# Altium PCB Edge_logic_analyzer.PcbDoc (part 1 of 3)
Units mm, origin at the board's own origin, x right, y up, seen from the top; angles counter-clockwise.
Board outline 76.03 x 55 mm, 4 copper layers (L1, L2, L3, L4), stack 1.527 mm thick; 110 components, 90 nets, 430 pads, 763 vias.
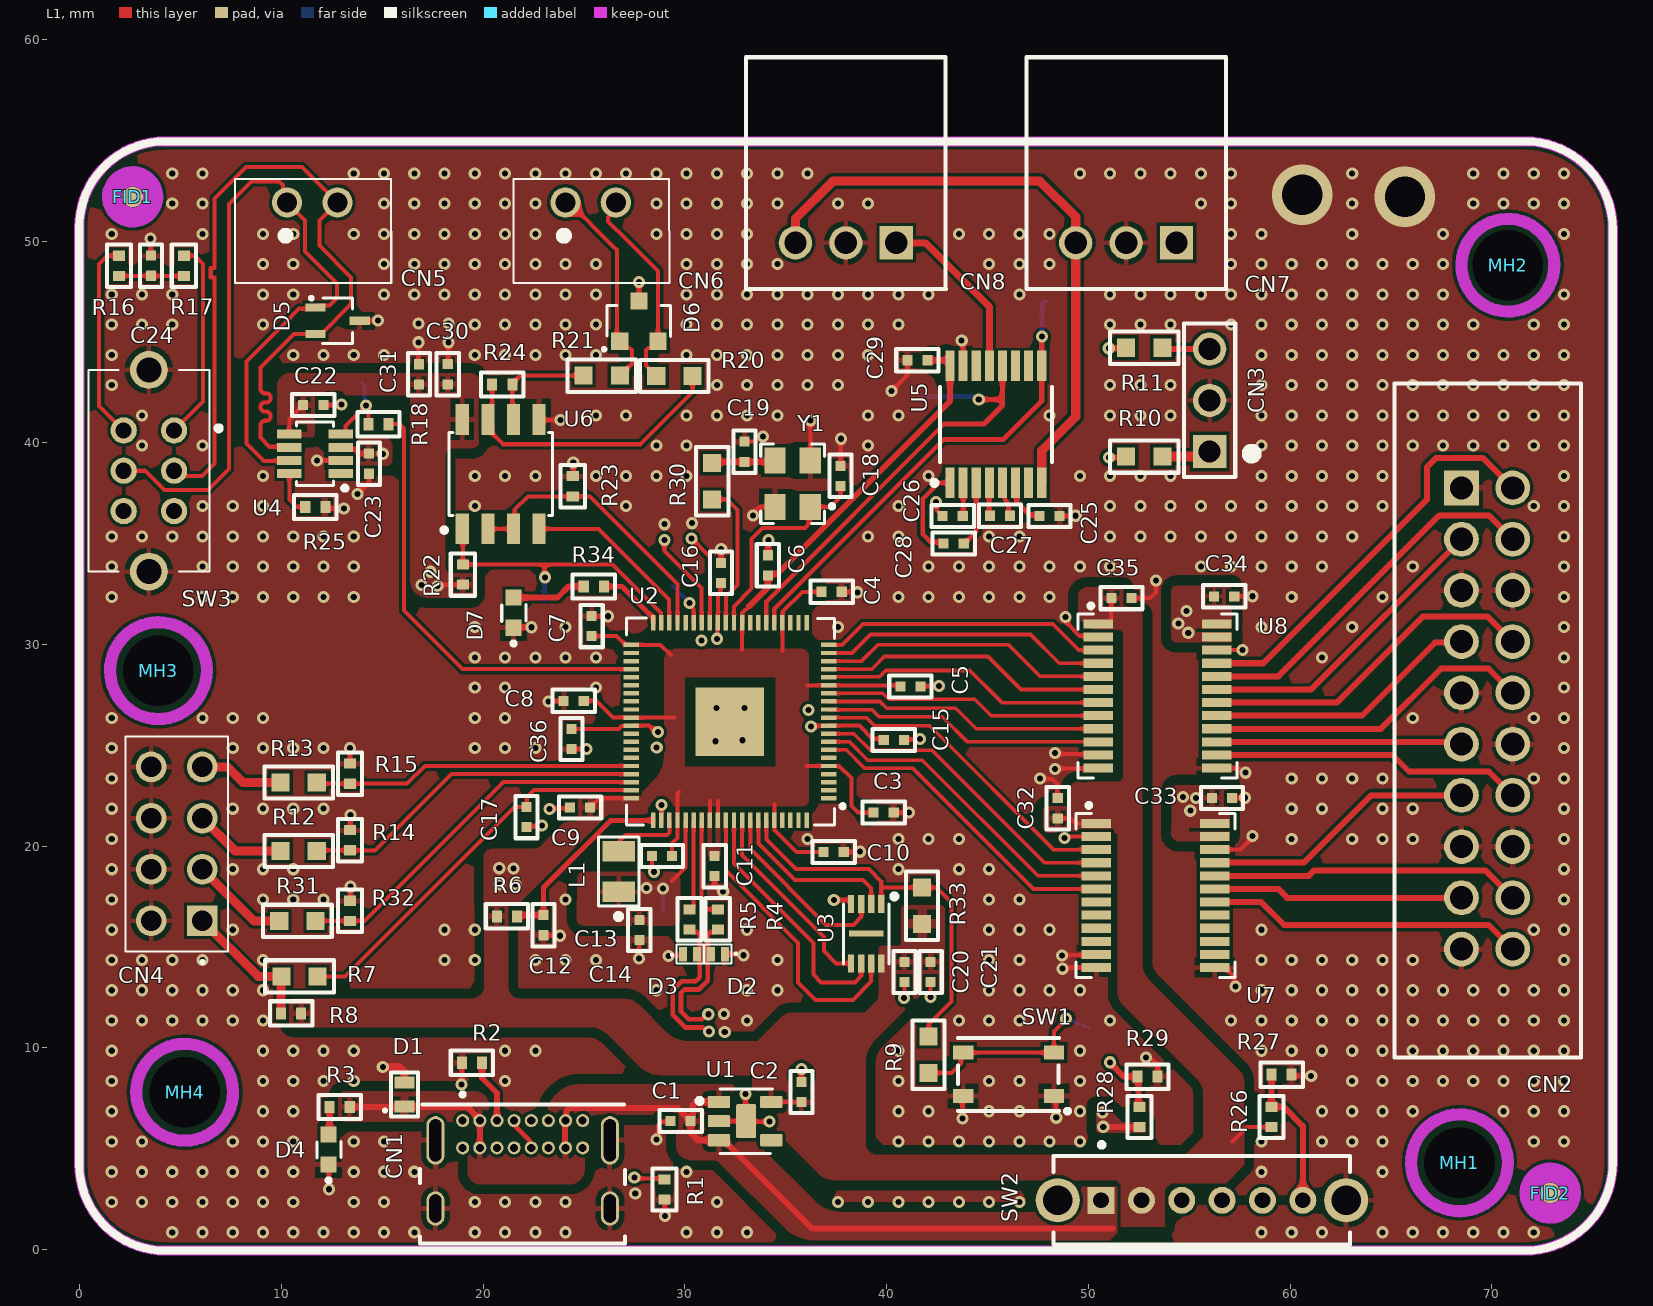
[diagram p0: L1 view]
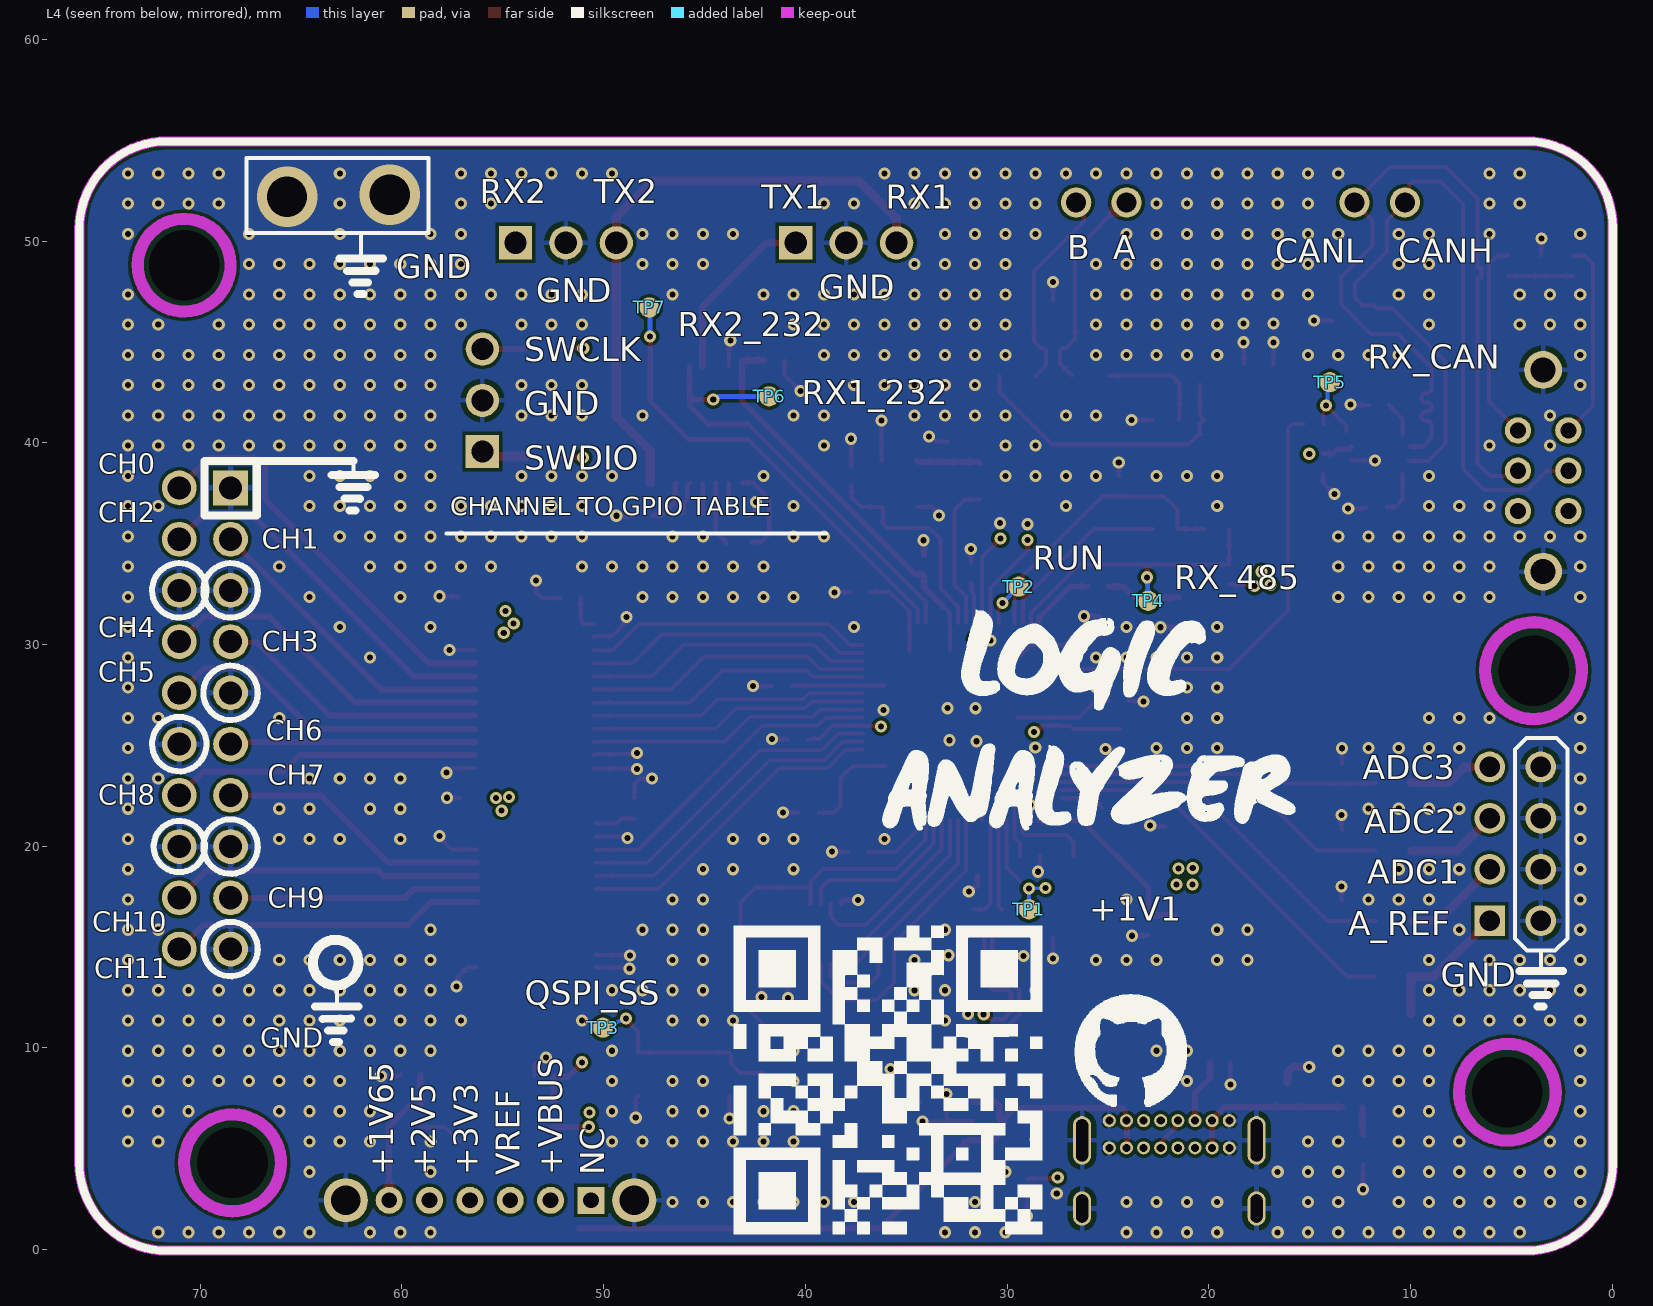
[diagram p1: L4 view, seen from below]
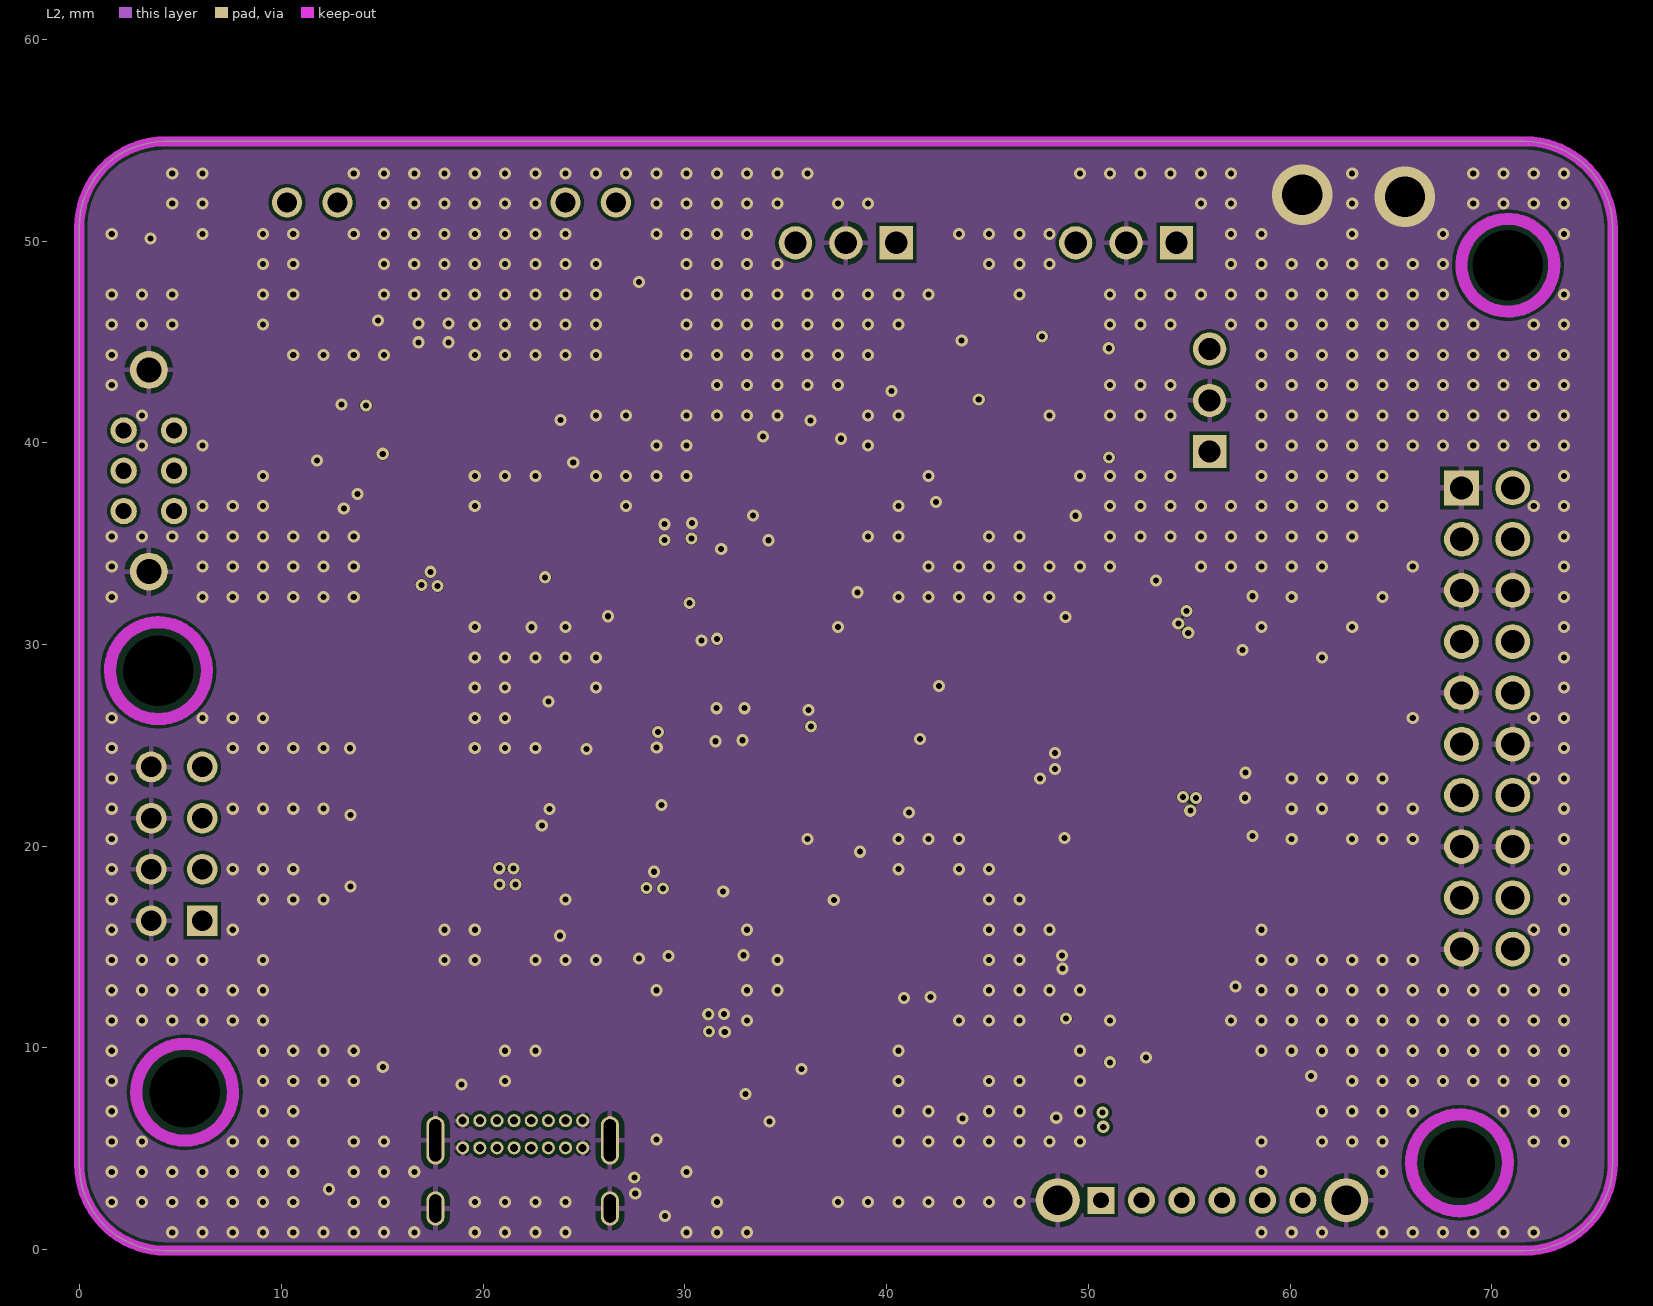
[diagram p2: L2]
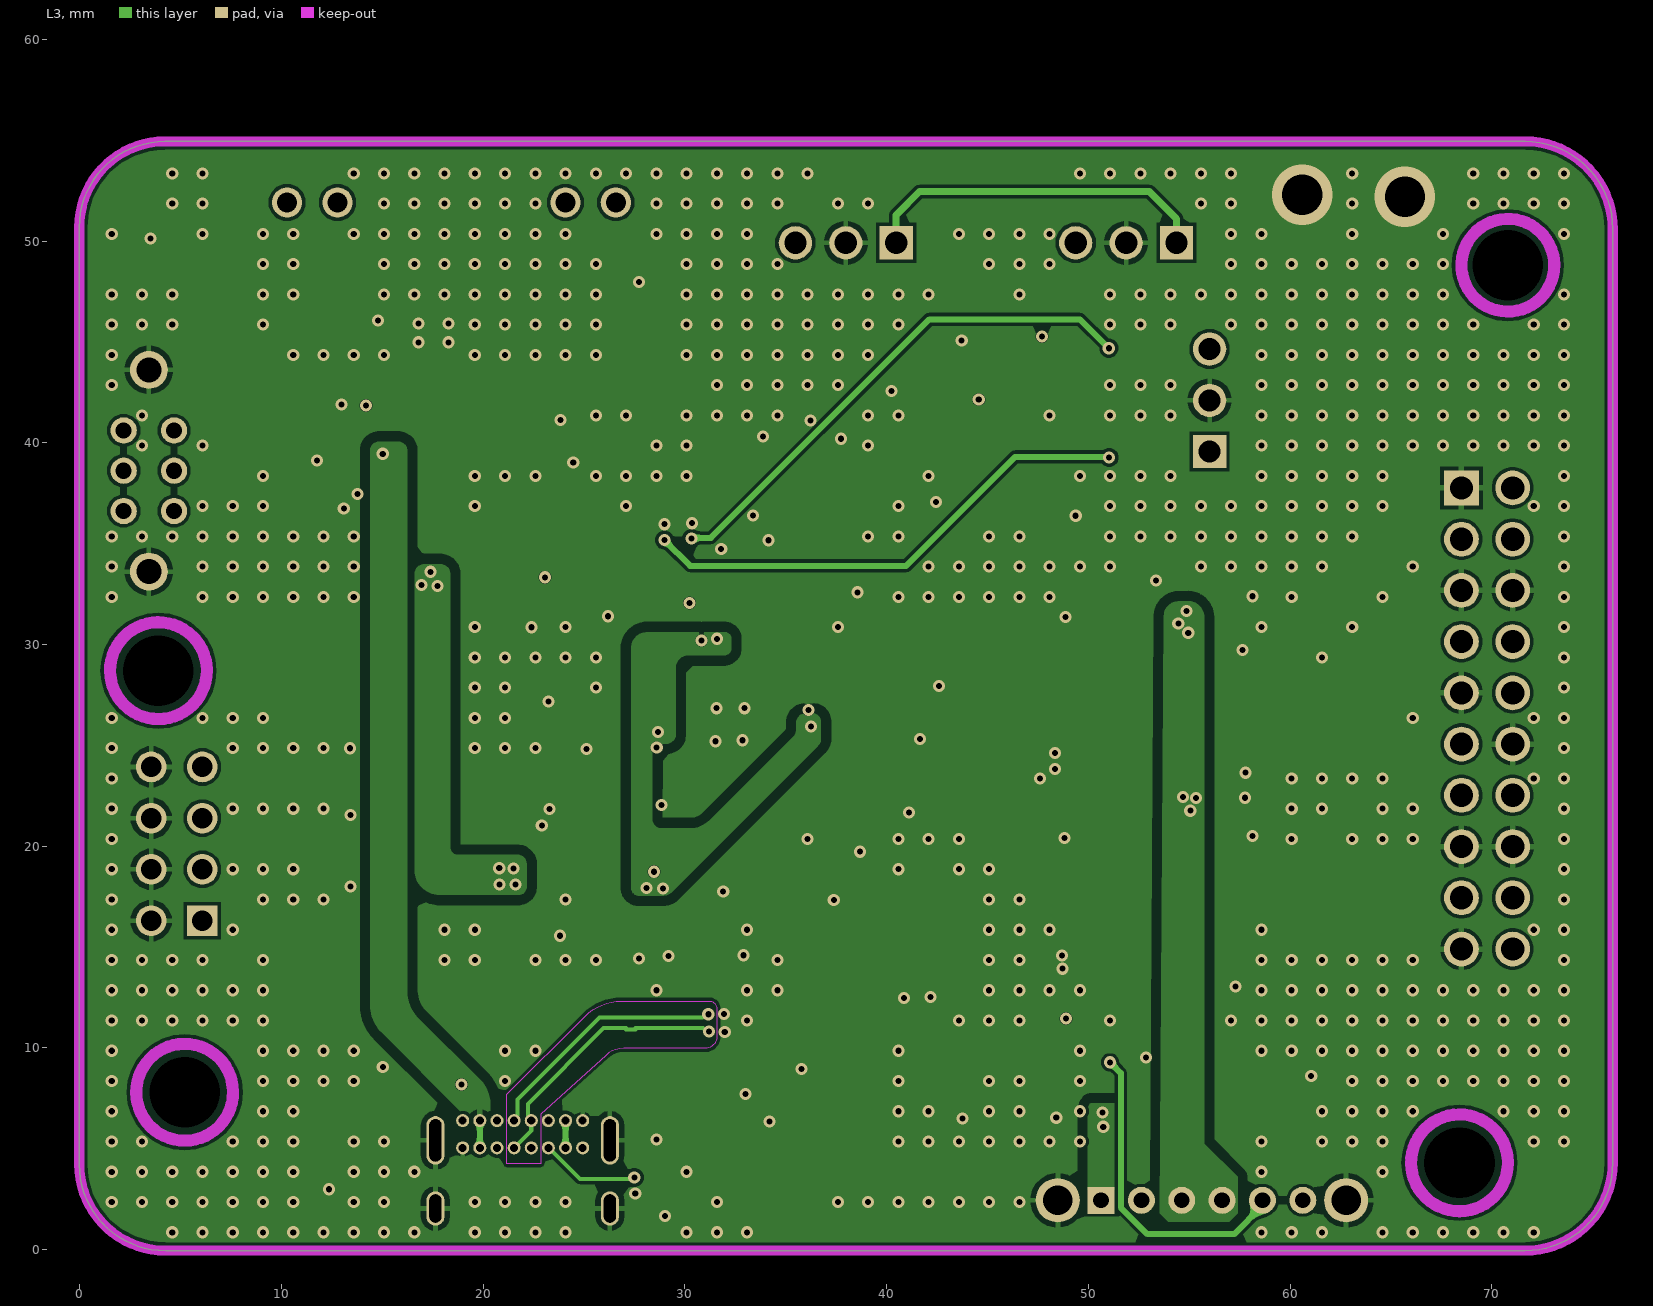
[diagram p3: L3]
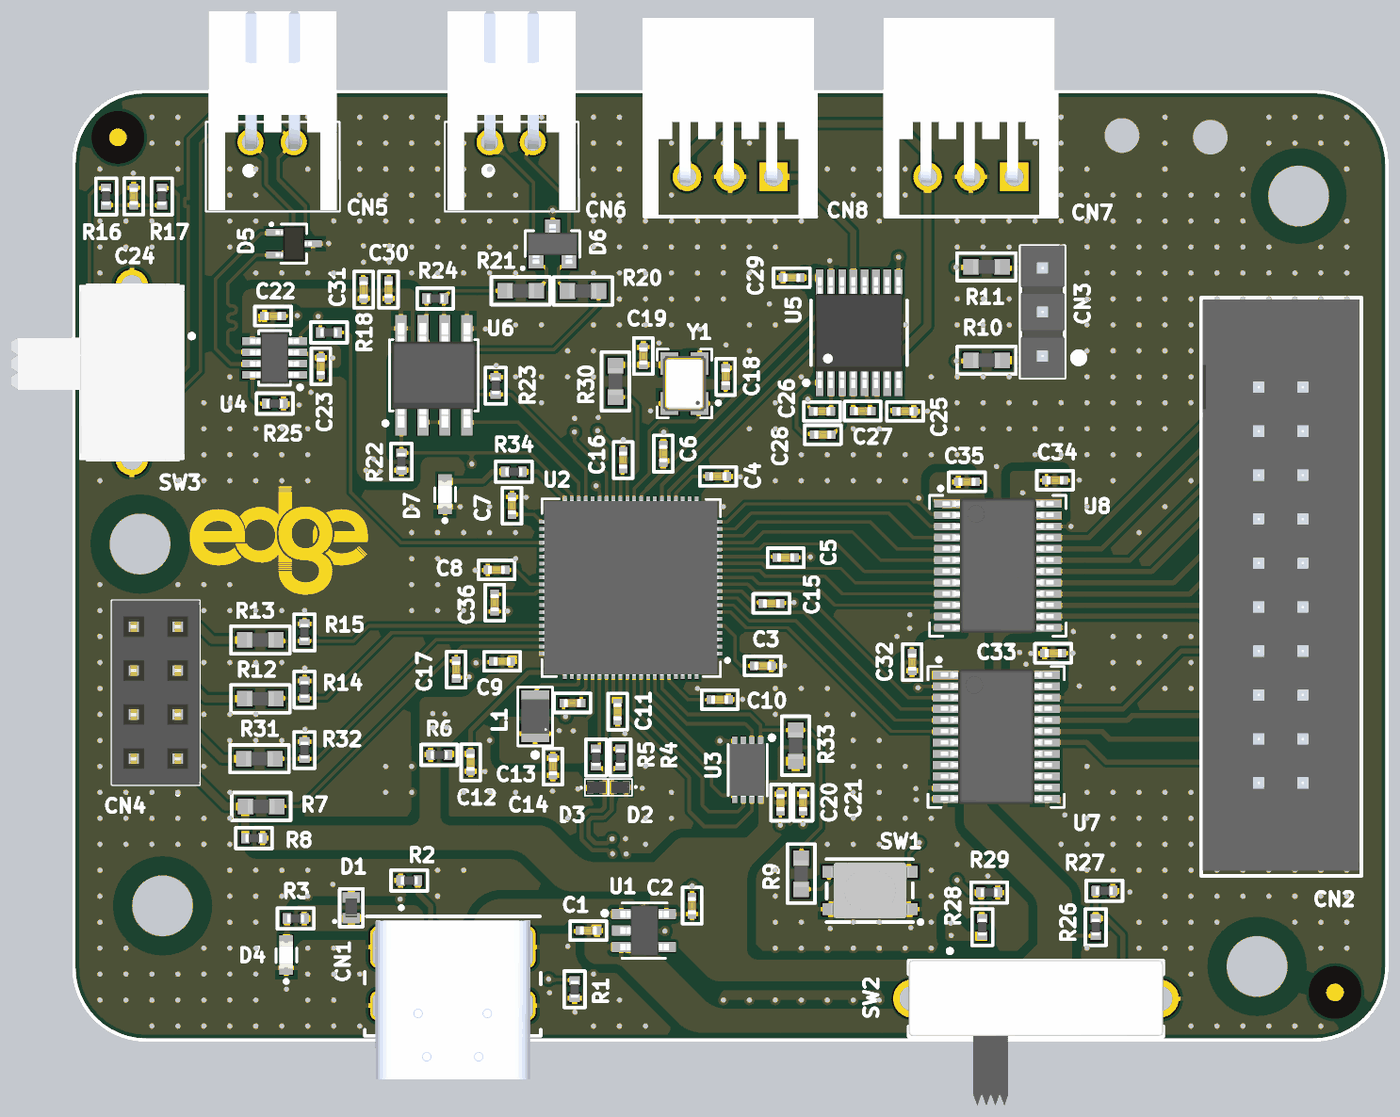
[diagram p5: 3D render of the assembled board from above, using the file's embedded part models]

## Layer stack, top to bottom
Top Solder: solder mask 0.0175, Solder Resist, Dk 3.5
L1: signal copper 0.0175
Dielectric 2: prepreg 0.196, PP-006, Dk 4.74
L2: signal copper 0.035
Dielectric 1: core 1.03, FR-4, Dk 4.6
L3: signal copper 0.035
Dielectric 3: prepreg 0.196, PP-006, Dk 4.74
L4: signal copper 0.0175
Bottom Solder: solder mask 0.0175, Solder Resist, Dk 3.5

## Board outline
71.644,-0.056 4.254,-0.056 cw(c4.254,4.224) -0.026,4.224 -0.026,50.688 cw(c4.226,50.688) 4.226,54.94 71.66,54.94 cw(c71.66,50.6) 76,50.6 76,4.3 cw(c71.644,4.3)

## Design rules (kind name [scope] priority, off if disabled: settings)
Clearance Clearance_polygon_vbus [InNet('+VBUS')and IsRegion vs InNet('GND')and IsRegion] p1: gap=0.5 ignorepadtopadclearanceinfootprint=FALSE
Clearance Clearance_polygon_vref [InNet('+VREF')and IsRegion vs InNet('GND')and IsRegion] p2: gap=0.5 ignorepadtopadclearanceinfootprint=FALSE
Clearance Clearance_polygon_1v1 [InNet('+1V1')and IsRegion vs InNet('GND')and IsRegion] p3: gap=0.5 ignorepadtopadclearanceinfootprint=FALSE
Clearance Clearance_polygon_3v3 [InNet('+3V3')and  IsRegion vs InNet('GND')  and IsRegion] p4: gap=0.5 ignorepadtopadclearanceinfootprint=FALSE
Clearance Clearance_polygon_rs232 [InNet('TX2') and IsRegion vs InNet('TX1')   and IsRegion] p5: gap=0.7 ignorepadtopadclearanceinfootprint=FALSE
Clearance Clearance_1 [All] p6: gap=0.16 ignorepadtopadclearanceinfootprint=FALSE
ComponentClearance TestPoints [HasFootprint('Test Point') vs HasFootprint('Test Point')] p1: gap=1.016 collisioncheckmode=3 verticalgap=0.254 showdistances=FALSE
ComponentClearance [All] p2: gap=0.254 collisioncheckmode=3 verticalgap=0.254 showdistances=FALSE
DiffPairsRouting [InDifferentialPairClass('DIFF90')] p1: maxlimit=0.32 minlimit=0.16 mostfreqgap=0.32 toplayer_maxgap=0.16 toplayer_prefgap=0.16 toplayer_minwidth=0.24 toplayer_maxwidth=0.24 toplayer_prefwidth=0.24 midlayer1_mingap=0.32 midlayer1_minwidth=0.2 midlayer1_maxwidth=0.2 midlayer1_prefwidth=0.2 midlayer2_mingap=0.32 midlayer2_minwidth=0.2 midlayer2_maxwidth=0.2 midlayer2_prefwidth=0.2 bottomlayer_maxgap=0.16 bottomlayer_prefgap=0.16 bottomlayer_minwidth=0.24 bottomlayer_maxwidth=0.24 bottomlayer_prefwidth=0.24 impedanceprofiledriven=TRUE impedanceprofileid={7AB5D74F-BADF-43C5-B50E-F4239966AECD} impedanceprofilevalue=90.000000 maxuncoupledlength=12.7
DiffPairsRouting DiffPairsRouting_120 [InDifferentialPairClass('DIFF120')] p2: maxlimit=0.9 minlimit=0.5 mostfreqgap=0.9 toplayer_maxgap=0.5 toplayer_prefgap=0.5 toplayer_minwidth=0.2 toplayer_maxwidth=0.2 toplayer_prefwidth=0.2 midlayer1_mingap=0.9 midlayer1_minwidth=0.15 midlayer1_maxwidth=0.15 midlayer1_prefwidth=0.15 midlayer2_mingap=0.9 midlayer2_minwidth=0.15 midlayer2_maxwidth=0.15 midlayer2_prefwidth=0.15 bottomlayer_maxgap=0.5 bottomlayer_prefgap=0.5 bottomlayer_minwidth=0.2 bottomlayer_maxwidth=0.2 bottomlayer_prefwidth=0.2 impedanceprofiledriven=TRUE impedanceprofileid={DCE377F0-FBE2-4714-9898-9E40421D4CAB} impedanceprofilevalue=120.000000 maxuncoupledlength=12.7
HoleSize [All] p1: absolutevalues=TRUE maxlimit=5 minlimit=0.025 maxpercent=80.000 minpercent=20.000
MatchedLengths MatchCan [InxSignalClass('CAN_SIGNAL')] p1: tolerance=25.4 checknetsindiffpair=TRUE checkdiffpairvsdiffpair=FALSE checkxsignals=FALSE checkothers=FALSE usedelayunits=TRUE delaytolerance=1.000000
MatchedLengths MatchRS485 [InxSignalClass('485_SIGNALS')] p2: tolerance=25.4 checknetsindiffpair=TRUE checkdiffpairvsdiffpair=FALSE checkxsignals=FALSE checkothers=FALSE usedelayunits=TRUE delaytolerance=1.000000
MatchedLengths MatchUSB [InxSignalClass('USB_SIGNAL')] p3: tolerance=25.4 checknetsindiffpair=TRUE checkdiffpairvsdiffpair=FALSE checkxsignals=FALSE checkothers=FALSE usedelayunits=TRUE delaytolerance=2.000000
MinimumSolderMaskSliver [All] p1: minsoldermaskwidth=0.1
PolygonConnect "Relief 2312" [(HasFootprint('C2312') OR HasFootprint('R2312')OR HasFootprint('L2312')) AND IsPad vs IsPolygon] p1: thpad.connectstyle=Relief thpad.reliefconductorwidth=1.5 thpad.reliefentries=4 thpad.polygonreliefangle="90 Angle" thpad.airgapwidth=0.2 smdpad.connectstyle=Relief smdpad.reliefconductorwidth=1.5 smdpad.reliefentries=4 smdpad.polygonreliefangle="90 Angle" smdpad.airgapwidth=0.2 via.connectstyle=Direct via.reliefconductorwidth=0.254 via.reliefentries=4 via.polygonreliefangle="90 Angle" via.airgapwidth=0.254
PolygonConnect "Relief 1206" [(HasFootprint('C1206') OR HasFootprint('R1206') or HasFootprint('L1206')) AND IsPad vs IsPolygon] p2: thpad.connectstyle=Relief thpad.reliefconductorwidth=1.1 thpad.reliefentries=4 thpad.polygonreliefangle="90 Angle" thpad.airgapwidth=0.2 smdpad.connectstyle=Relief smdpad.reliefconductorwidth=1.1 smdpad.reliefentries=4 smdpad.polygonreliefangle="90 Angle" smdpad.airgapwidth=0.2 via.connectstyle=Direct via.reliefconductorwidth=0.254 via.reliefentries=4 via.polygonreliefangle="90 Angle" via.airgapwidth=0.254
PolygonConnect "Relief 0806" [(HasFootprint('C0805') OR HasFootprint('R0805') OR HasFootprint('L0805')) AND IsPad vs IsPolygon] p3: thpad.connectstyle=Relief thpad.reliefconductorwidth=0.7 thpad.reliefentries=4 thpad.polygonreliefangle="90 Angle" thpad.airgapwidth=0.254 smdpad.connectstyle=Relief smdpad.reliefconductorwidth=0.7 smdpad.reliefentries=4 smdpad.polygonreliefangle="90 Angle" smdpad.airgapwidth=0.254 via.connectstyle=Direct via.reliefconductorwidth=0.254 via.reliefentries=4 via.polygonreliefangle="90 Angle" via.airgapwidth=0.254
PolygonConnect "Relief 0603" [(HasFootprint('C0603') OR HasFootprint('R0603') OR HasFootprint('L0603')) AND IsPad vs IsPolygon] p4: thpad.connectstyle=Relief thpad.reliefconductorwidth=0.5 thpad.reliefentries=4 thpad.polygonreliefangle="90 Angle" thpad.airgapwidth=0.254 smdpad.connectstyle=Relief smdpad.reliefconductorwidth=0.5 smdpad.reliefentries=4 smdpad.polygonreliefangle="90 Angle" smdpad.airgapwidth=0.254 via.connectstyle=Direct via.reliefconductorwidth=0.254 via.reliefentries=4 via.polygonreliefangle="90 Angle" via.airgapwidth=0.254
PolygonConnect "Relief 0402" [(HasFootprint('C0402') OR HasFootprint('R0402') OR HasFootprint('L0402')) AND IsPad vs IsPolygon] p5: thpad.connectstyle=Relief thpad.reliefconductorwidth=0.3 thpad.reliefentries=4 thpad.polygonreliefangle="90 Angle" thpad.airgapwidth=0.127 smdpad.connectstyle=Relief smdpad.reliefconductorwidth=0.3 smdpad.reliefentries=4 smdpad.polygonreliefangle="90 Angle" smdpad.airgapwidth=0.127 via.connectstyle=Direct via.reliefconductorwidth=0.254 via.reliefentries=4 via.polygonreliefangle="90 Angle" via.airgapwidth=0.254
PolygonConnect [All] p6: thpad.connectstyle=Relief thpad.reliefconductorwidth=0.254 thpad.reliefentries=4 thpad.polygonreliefangle="90 Angle" thpad.airgapwidth=0.254 smdpad.connectstyle=Relief smdpad.reliefconductorwidth=0.254 smdpad.reliefentries=4 smdpad.polygonreliefangle="90 Angle" smdpad.airgapwidth=0.254 via.connectstyle=Direct via.reliefconductorwidth=0.254 via.reliefentries=4 via.polygonreliefangle="90 Angle" via.airgapwidth=0.254
RoutingVias [All] p1: holewidth=0.3 width=0.6 viastyle="Through Hole" minholewidth=0.3 minwidth=0.6 maxholewidth=6.2 maxwidth=12.4
SilkToSolderMaskClearance [IsPad] p1: minsilkscreentomaskgap=0.051 clearancetoexposedcopper=TRUE
SolderMaskExpansion [All] p1: expansion=0.102 istentingtop=FALSE
SupplyNets "Schematic Supply Nets_4" [InNet('+3V3')] p1: voltage=0.000
SupplyNets "Schematic Supply Nets_3" [InNet('+1V1')] p2: voltage=0.000
SupplyNets "Schematic Supply Nets_2" [InNet('+VREF')] p3: voltage=0.000
SupplyNets "Schematic Supply Nets_1" [InNet('+VBUS')] p4: voltage=0.000
SupplyNets "Schematic Supply Nets" [InNet('GND')] p5: voltage=0.000
UnpouredPolygon UnpouredPolygon_1 [All] p1:
ViasUnderSMD ViasUnderSMD_GND [Net = ('GND')] p1: allowed=TRUE
ViasUnderSMD [All] p2: allowed=FALSE
Width POWER [InNet('+*')] p1: maxlimit=0.3 minlimit=0.2 preferedwidth=0.3
Width USB [InNetClass('USB')] p2: maxlimit=0.254 minlimit=0.254 preferedwidth=0.254
Width USBR_ROUTING_WIDTH [InNet('USBR_N') AND InNet('USBR_P')] p3: maxlimit=0.3 minlimit=0.17 preferedwidth=0.2
Width CAN [InNetClass('CAN')] p4: maxlimit=0.254 minlimit=0.254 preferedwidth=0.254
Width RS485 [InNetClass('CAN')] p5: maxlimit=0.254 minlimit=0.254 preferedwidth=0.254
Width [All] p6: maxlimit=1 minlimit=0.15 preferedwidth=0.2
24 further rules are at their usual default settings.

## Classes and differential pairs
component class "[08] - ASSEMBLIES": J1 J2 J3 J4 J5
net class RS485: 485_A 485_B
differential pair class DIFF120: 485 CAN
net class CAN: CAN_H CAN_L
component class "[07] - TRANSCEIVERS": C22 C23 C24 C25 C26 C27 C28 C29 C30 C31 D5 D6 R16 R17 R18 R20 R21 R22 R23 R24 R25 SW3 TP4 TP5 TP6 TP7 U4 U5 U6
component class "[06] - CONNECTORS": CN2 CN3 CN4 CN5 CN6 CN7 CN8 R10 R11 R12 R13 R14 R15 R31 R32
component class "[05] - PERIPHERALS": C18 C19 C20 C21 C32 C33 C34 C35 R9 R26 R27 R28 R29 R30 R33 SW1 SW2 TP3 U3 U7 U8 Y1
differential pair class DIFF90: USB USBR
net class USB: USB_N USB_P
differential pair USB: +USB_P -USB_N
differential pair 485: +485_B -485_A
differential pair CAN: +CAN_H -CAN_L

## Components (designator, comment, footprint, x,y, rotation, side; value= is the part's Value field where it differs from the comment)
C1 "1µF/16V" C0402 29.788,6.369 r180 top value=1uF
C2 "1µF/16V" C0402 35.776,7.812 r90 top value=1uF
C3 "100nF/10V" C0402 39.854,21.662 r0 top value=100nF
C4 "100nF/10V" C0402 37.276,32.612 r0 top value=100nF
C5 "100nF/10V" C0402 41.181,27.91 r0 top value=100nF
C6 "100nF/10V" C0402 34.112,33.922 r270 top value=100nF
C7 "100nF/10V" C0402 25.376,30.912 r90 top value=100nF
C8 "100nF/10V" C0402 24.485,27.206 r180 top value=100nF
C9 "100nF/10V" C0402 24.803,21.922 r180 top value=100nF
C10 "100nF/10V" C0402 37.376,19.712 r180 top value=100nF
C11 "100nF/10V" C0402 31.476,19.012 r270 top value=100nF
C12 "4µ7/6.3V" C0402 22.99,16.085 r270 top value=4.7uF
C13 "4µ7/6.3V" C0402 27.74,15.844 r90 top value=4.7uF
C14 "4µ7/6.3V" C0402 28.865,19.519 r0 top value=4.7uF
C15 "100nF/10V" C0402 40.358,25.269 r180 top value=100nF
C16 "4µ7/6.3V" C0402 31.796,33.548 r270 top value=4.7uF
C17 "4µ7/6.3V" C0402 22.153,21.443 r270 top value=4.7uF
C18 "15p/50V" C0402 37.716,38.356 r270 top value=15pF
C19 "15p/50V" C0402 32.96,39.556 r270 top value=15pF
C20 "4µ7/6.3V" C0402 40.884,13.761 r90 top value=4.7uF
C21 "100nF/10V" C0402 42.184,13.761 r90 top value=100nF
C22 "100nF/10V" C0402 11.576,41.87 r0 top value=100nF
C23 "100nF/10V" C0402 14.337,38.965 r270 top value=100nF
C24 "4µ7/6.3V" C0402 3.534,48.778 r90 top value=4.7uF
C25 "470nF/50V" C0402 48.076,36.362 r180 top value=470nF
C26 "470nF/50V" C0402 43.276,36.362 r0 top value=470nF
C27 "470nF/50V" C0402 45.622,36.382 r180 top value=470nF
C28 "100nF/10V" C0402 43.326,35.012 r180 top value=100nF
C29 "100nF/10V" C0402 41.527,44.089 r0 top value=100nF
C30 "100nF/10V" C0402 18.245,43.396 r270 top value=100nF
C31 "100nF/10V" C0402 16.812,43.391 r270 top value=100nF
C32 "100nF/10V" C0402 48.487,21.881 r270 top value=100nF
C33 "100nF/10V" C0402 56.626,22.393 r180 top value=100nF
C34 "100nF/10V" C0402 56.734,32.388 r180 top value=100nF
C35 "100nF/10V" C0402 51.647,32.295 r180 top value=100nF
C36 "100nF/10V" C0402 24.376,25.312 r90 top value=100nF
CN1 "USB4085-GF-A" USB4085-GF-A 18.983,6.394 r0 top locked
CN2 "302-S201" SHDR20W66P254_2X10_3300X905X905P 68.5,37.76 r270 top
CN3 "PEC03SAAN" PEC03SAAN 56.014,39.562 r90 top
CN4 "PPPC042LFBN-RC" XPYC042LFBN-RC 6.076,16.307 r90 top
CN5 "S2B-XH-A" S2B-XH-A 10.276,51.912 r0 top locked
CN6 "S2B-XH-A" S2B-XH-A 24.076,51.912 r0 top locked
CN7 "S3B-XH-A (LF)(SN)" SHDRRA3W64P0X250_1X3_990X1150X610P 54.376,49.912 r0 top
CN8 "S3B-XH-A (LF)(SN)" SHDRRA3W64P0X250_1X3_990X1150X610P 40.476,49.912 r0 top
D1 "STN161050U852" STN161050U852 16.098,7.687 r90 top
D2 "TPD1E0B04DPYR" TPD1E0B04DPYR 31.633,14.644 r180 top
D3 "TPD1E0B04DPYR" TPD1E0B04DPYR 30.25,14.644 r0 top
D4 "LTST-C190KRKT" LTST-C190KRKT 12.338,4.96 r90 top
D5 "ESD2CAN24DCKRQ1" ESD2CAN24DCKRQ1 12.778,46.049 r0 top
D6 "CDSOT23-SM712" CDSOT23-SM712 27.717,46.032 r90 top
D7 "LTST-C190KFKT" LTST-C190KFKT 21.504,31.577 r90 top
FID1 "FID_40X1.20" FID_40X1.20 2.62,52.189 r0 top
FID2 "FID_40X1.20" FID_40X1.20 72.9,2.8 r90 top
L1 "3µ3" "L0806 - RP2350" 26.715,18.744 r90 top
MH1 "MH_7.4MMC_3.2MMD" MH_7.4MMC_3.2MMD 68.4,4.301 r0 top
MH2 "MH_7.4MMC_3.2MMD" MH_7.4MMC_3.2MMD 70.8,48.801 r0 top
MH3 "MH_7.4MMC_3.2MMD" MH_7.4MMC_3.2MMD 3.9,28.701 r0 top
MH4 "MH_7.4MMC_3.2MMD" MH_7.4MMC_3.2MMD 5.2,7.801 r0 top
R1 "5K1" R0402 28.992,2.981 r90 top value=5.1K
R2 "5K1" R0402 19.441,9.263 r180 top value=5.1K
R3 "10K" R0402 12.883,7.071 r0 top value=10kR
R4 "27R" R0402 31.633,16.369 r270 top
R5 "27R" R0402 30.233,16.369 r270 top
R6 "33R" R0402 21.177,16.522 r180 top
R7 "1R" R0603 10.893,13.543 r180 top
R8 "200R" R0402 10.476,11.712 r0 top
R9 "1K" R0603 42.074,9.659 r90 top value=1kR
R10 "100R" R0603 52.776,39.312 r0 top
R11 "100R" R0603 52.776,44.712 r0 top
R12 "370K" R0603 10.848,19.76 r180 top
R13 "370K" R0603 10.848,23.16 r180 top
R14 "100K" R0402 13.392,20.296 r270 top value=100kR
R15 "100K" R0402 13.392,23.596 r90 top value=100kR
R16 "60R4" R0402 1.939,48.772 r90 top value=60.4R
R17 "60R4" R0402 5.16,48.772 r270 top value=60.4R
R18 "10R" R0402 14.809,40.919 r180 top
R20 "100R" R0603 29.481,43.313 r180 top
R21 "100R" R0603 25.878,43.326 r0 top
R22 "10K" R0402 18.991,33.465 r270 top value=10kR
R23 "10K" R0402 24.438,37.842 r270 top value=10kR
R24 "120R" R0402 20.946,42.883 r180 top
R25 "10K" R0402 11.676,36.812 r180 top value=10kR
R26 "10K" R0402 59.083,6.571 r90 top value=10kR
R27 "10K" R0402 59.583,8.671 r180 top value=10kR
R28 "10K" R0402 52.533,6.571 r90 top value=10kR
R29 "10K" R0402 52.933,8.571 r0 top value=10kR
R30 "1K" R0603 31.35,38.091 r270 top value=1kR
R31 "370K" R0603 10.792,16.296 r180 top
R32 "100K" R0402 13.392,16.796 r270 top value=100kR
R33 "1K" R0603 41.758,17.049 r270 top value=1kR
R34 "10K" R0402 25.484,32.875 r180 top value=10kR
SW1 "PTS815SJM250SMTRLFS" PTS526SK15SMTR2_LFS 46.047,8.69 r180 top
SW2 "SLW-147844-4A-RA-S-D" SLW-147844-4A-RA-S-D 50.633,2.444 r0 top locked
SW3 "EG2208" EG2208 4.676,40.612 r270 top locked
TP1 "TestPoint" "TEST POINT"#1 24.941,15.269 r90 top
TP2 "TestPoint" "Test Point" 29.423,32.869 r90 top
TP3 "TestPoint" "TEST POINT"#2 50.034,10.54 r90 top
TP4 "TestPoint" "TEST POINT"#3 23.012,32.162 r90 top
TP5 "TestPoint" "TEST POINT"#4 14.6,43.3 r90 top
TP6 "TestPoint" "TEST POINT"#5 40.134,42.3 r90 top
TP7 "TestPoint" "Test Point" 47.735,46.709 r90 top
U1 "TLV75533" TLV75533PDBVR 33.033,6.371 r0 top
U2 "SC1510" SC1510 32.233,26.175 r180 top locked
U3 "W25Q32RVXHJQTR" W25Q32RVXHJQ_TR 38.984,15.661 r270 top
U4 "TCAN1044AVDDFRQ1" TCAN1044AVDDFRQ1 11.664,39.449 r180 top
U5 "MAX3232CPWR" MAX3232CPWR 45.418,40.911 r90 top
U6 "THVD1400DR" THVD1400DR 20.868,38.444 r90 top
U7 "74LVC8T245PW,118" 74LVC8T245PW,118 53.333,17.554 r0 top locked
U8 "74LVC8T245PW,118" 74LVC8T245PW,118 53.433,27.444 r0 top locked
Y1 "ABM8-272-T3" ABM8-272-T3 35.336,37.968 r90 top

## Footprints (in the part's own frame and the unit in brackets; to place one, negate y for a bottom-side part, rotate by r counter-clockwise, add the part's x,y. Pads: shape width x height; smd on the part's side, far side on the other; paste and mask are expansions set on the pad)
74LVC8T245PW,118 [mm]
  rect 1.475x0.45 smd mask+0.03: 1(-2.938,3.575) 2(-2.938,2.925) 3(-2.938,2.275) 4(-2.938,1.625) 5(-2.938,0.975) 6(-2.938,0.325) 7(-2.938,-0.325) 8(-2.938,-0.975) 9(-2.938,-1.625) 10(-2.938,-2.275) 11(-2.938,-2.925) 12(-2.938,-3.575) 13(2.938,-3.575) 14(2.938,-2.925) 15(2.938,-2.275) 16(2.938,-1.625) 17(2.938,-0.975) 18(2.938,-0.325) 19(2.938,0.325) 20(2.938,0.975) 21(2.938,1.625) 22(2.938,2.275) 23(2.938,2.925) 24(2.938,3.575)
  silkscreen extent -3.94,-4.06 3.94,4.56, body extent -3.2,-3.88 3.23,3.92, height 1
ABM8-272-T3 [mm]
  rect 1.3x1.05 smd: 1(-1.15,-0.875) 2(1.15,-0.875) 3(1.15,0.875) 4(-1.15,0.875)
  silkscreen extent -1.98,-2.04 1.98,1.57, body extent -1.6,-1.25 1.6,1.25, height 0.75
C0402 [mm]
  rect 0.5x0.5 smd: 1(-0.5,0) 2(0.5,0)
  silkscreen extent -1.05,-0.55 1.05,0.55, body extent -0.5,-0.25 0.5,0.25, height 0.51
CDSOT23-SM712 [mm]
  rect 0.85x0.85 smd: 1(-1,0.95) 2(-1,-0.95) 3(1,0)
  silkscreen extent -1.44,-1.57 0.76,1.76, body extent -1.15,-1.45 1.15,1.45, height 1.17
EG2208 [mm]
  round 1.3 hole 0.8: 1(0,0) 2(2,0) 3(4,0) 4(0,-2.5) 5(2,-2.5) 6(4,-2.5)
  round 1.875 hole 1.25: MH1(-3,-1.25) MH2(7,-1.25)
  silkscreen extent -3,-4.25 7,2.31, body extent -3.15,-8.2 7.15,1.8, height 4.94
ESD2CAN24DCKRQ1 [mm]
  rect 1x0.4 smd mask+0.06: 1(-1.1,0.65) 2(-1.1,-0.65) 3(1.1,0)
  silkscreen extent -1.33,-1.12 0.75,1.15, body extent -1.05,-1 1.05,1, height 1
FID_40X1.20 [mil]
  round 40 smd paste-40 mask+40: ""(0,0)
  L1 keep-out circle w39.37: c0,0 r40.16
"L0806 - RP2350" [mm]
  rect 1x1.6 smd: 1(-1,0) 2(1,0)
  silkscreen extent -2.25,-1 1.7,1, body extent -1,-0.8 1,0.8, height 1
LTST-C190KFKT [mm]
  rect 0.8x0.8 smd mask+0.05: 1(0.75,0) 2(-0.75,0)
  silkscreen extent -1.62,-0.61 0.39,0.58, body extent -0.8,-0.4 0.8,0.4, height 0.8
LTST-C190KRKT [mm]
  rect 0.8x0.8 smd mask+0.05: 1(0.75,0) 2(-0.75,0)
  silkscreen extent -1.62,-0.61 0.39,0.58, body extent -0.8,-0.4 0.8,0.4, height 0.8
MAX3232CPWR [mm] "TSOP, 16-Leads, Body 5,00x4,40mm, Pitch 0,65mm, IPC Medium Density"
  rect 1.5x0.45 smd mask+0.05: 1(-2.9,2.275) 2(-2.9,1.625) 3(-2.9,0.975) 4(-2.9,0.325) 5(-2.9,-0.325) 6(-2.9,-0.975) 7(-2.9,-1.625) 8(-2.9,-2.275) 9(2.9,-2.275) 10(2.9,-1.625) 11(2.9,-0.975) 12(2.9,-0.325) 13(2.9,0.325) 14(2.9,0.975) 15(2.9,1.625) 16(2.9,2.275)
  silkscreen extent -3.02,-2.78 1.85,3.17, body extent -3.2,-2.55 3.2,2.55, height 1.2
MH_7.4MMC_3.2MMD [mm]
  round 0 hole 3.5: ""(0,0)
PEC03SAAN [mm]
  rect 1.65x1.65 hole 1.1: 1(0,0)
  round 1.65 hole 1.1: 2(2.54,0) 3(5.08,0)
  silkscreen extent -1.27,-2.32 6.35,1.27, body extent -1.27,-1.27 6.35,1.27, height 8.38
PTS526SK15SMTR2_LFS [mm]
  rect 1x0.7 smd: 1(-2.25,1.075) 2(2.25,1.075) 3(-2.25,-1.075) 4(2.25,-1.075)
  silkscreen extent -3.01,-1.8 2.51,1.92, body extent -2.25,-1.59 2.25,1.61, height 2.5
R0402 [mm]
  rect 0.5x0.6 smd: 1(-0.5,0) 2(0.5,0)
  silkscreen extent -1.05,-0.6 1.05,0.6, body extent -0.5,-0.25 0.5,0.25, height 0.41
R0603 [mm]
  rect 0.9x0.9 smd: 1(-0.9,0) 2(0.9,0)
  silkscreen extent -1.7,-0.8 1.7,0.8, body extent -0.78,-0.4 0.78,0.4, height 0.46
S2B-XH-A [mm]
  round 1.5 hole 1: 1(0,0) 2(2.5,0)
  silkscreen extent -2.58,-4 5.16,1.17, body extent -2.42,-3.93 4.98,7.57, height 6.15
SC1510 [mm] "IC - MCU - ARM Microcontrollers - MCU RP2350B 150MHz clock Dual Arm Cortex-M33 cores 520KB RAM 8KB on-chip QFN-80"
  rect 0.78x0.22 smd mask+0.03: 1(-4.896,3.8) 2(-4.896,3.4) 3(-4.896,3) 4(-4.896,2.6) 5(-4.896,2.2) 6(-4.896,1.8) 7(-4.896,1.4) 8(-4.896,1) 9(-4.896,0.6) 10(-4.896,0.2) 11(-4.896,-0.2) 12(-4.896,-0.6) 13(-4.896,-1) 14(-4.896,-1.4) 15(-4.896,-1.8) 16(-4.896,-2.2) 17(-4.896,-2.6) 18(-4.896,-3) 19(-4.896,-3.4) 20(-4.896,-3.8) 41(4.897,-3.801) 42(4.897,-3.401) 43(4.897,-3.001) 44(4.897,-2.601) 45(4.897,-2.201) 46(4.897,-1.801) 47(4.897,-1.401) 48(4.897,-1.001) 49(4.897,-0.601) 50(4.897,-0.201) 51(4.897,0.199) 52(4.897,0.599) 53(4.897,0.999) 54(4.897,1.399) 55(4.897,1.799) 56(4.897,2.199) 57(4.897,2.599) 58(4.897,3) 59(4.897,3.4) 60(4.897,3.799)
  rect 0.22x0.78 smd mask+0.03: 21(-3.8,-4.897) 22(-3.4,-4.897) 23(-3,-4.897) 24(-2.6,-4.897) 25(-2.2,-4.897) 26(-1.8,-4.897) 27(-1.4,-4.897) 28(-1,-4.897) 29(-0.6,-4.897) 30(-0.2,-4.897) 31(0.2,-4.897) 32(0.6,-4.897) 33(1,-4.897) 34(1.4,-4.897) 35(1.8,-4.897) 36(2.2,-4.897) 37(2.6,-4.897) 38(3,-4.897) 39(3.4,-4.897) 40(3.8,-4.897) 61(3.8,4.897) 62(3.4,4.897) 63(3,4.897) 64(2.6,4.897) 65(2.2,4.897) 66(1.8,4.897) 67(1.4,4.897) 68(1,4.897) 69(0.6,4.897) 70(0.2,4.897) 71(-0.2,4.897) 72(-0.6,4.897) 73(-1,4.897) 74(-1.4,4.897) 75(-1.8,4.897) 76(-2.2,4.897) 77(-2.6,4.897) 78(-3,4.897) 79(-3.4,4.897) 80(-3.8,4.897)
  rect 3.4x3.4 smd: 81(0,0)
  silkscreen extent -5.69,-5.13 5.13,5.13, body extent -5.05,-5.05 5.05,5.05, height 0.9
SHDR20W66P254_2X10_3300X905X905P [mm]
  rect 1.725x1.725 hole 1.15: 1(0,0)
  round 1.725 hole 1.15: 2(0,2.54) 3(2.54,0) 4(2.54,2.54) 5(5.08,0) 6(5.08,2.54) 7(7.62,0) 8(7.62,2.54) 9(10.16,0) 10(10.16,2.54) 11(12.7,0) 12(12.7,2.54) 13(15.24,0) 14(15.24,2.54) 15(17.78,0) 16(17.78,2.54) 17(20.32,0) 18(20.32,2.54) 19(22.86,0) 20(22.86,2.54)
  silkscreen extent -5.18,-3.33 28.23,5.92, body extent -5.07,-3.25 27.93,5.79, height 9.05
SHDRRA3W64P0X250_1X3_990X1150X610P [mm]
  rect 1.65x1.65 hole 1.1: 1(0,0)
  round 1.65 hole 1.1: 2(-2.5,0) 3(-5,0)
  silkscreen extent -7.45,-2.3 2.48,9.2, body extent -7.55,-2.32 2.35,9.18, height 6.1
SLW-147844-4A-RA-S-D [mm]
  rect 1.337x1.337 hole 0.78: 1(0,0)
  round 1.337 hole 0.78: 2(2,0) 3(4,0) 4(6,0) 5(8,0) 6(10,0)
  round 2.19 hole 1.46: 7(-2.15,0) 8(12.15,0)
  silkscreen extent -2.35,-2.2 12.35,2.86, body extent -2.35,-6.17 12.35,2.23, height 4.7
STN161050U852 [mm]
  rect 0.6x1 smd mask+0.064: 1(-0.6,0) 2(0.6,0)
  silkscreen extent -1.1,-0.67 1.09,1.02, body extent -0.54,-0.34 0.54,0.34, height 0.5
TCAN1044AVDDFRQ1 [mm]
  rect 1.2x0.45 smd mask+0.04: 1(-1.275,0.975) 2(-1.275,0.325) 3(-1.275,-0.325) 4(-1.275,-0.975) 5(1.275,-0.975) 6(1.275,-0.325) 7(1.275,0.325) 8(1.275,0.975)
  silkscreen extent -1.58,-1.57 0.91,1.8, body extent -1.41,-1.45 1.41,1.45, height 0.9
"TEST POINT"#1 [mm]
  round 1 smd far side paste-1: 1(1.598,-3.975)
"TEST POINT"#2 [mm]
  round 1 smd far side paste-1: 1(0.46,0)
"TEST POINT"#3 [mm]
  round 1 smd far side paste-1: 1(0,0)
"TEST POINT"#4 [mm]
  round 1 smd far side paste-1: 1(-0.3,0.6)
"TEST POINT"#5 [mm]
  round 1 smd far side paste-1: 1(0,-1.666)
"Test Point" [mm]
  round 1 smd far side paste-1: 1(0,0)
THVD1400DR [mm]
  rect 1.528x0.65 smd mask+0.06: 1(-2.711,1.905) 2(-2.711,0.635) 3(-2.711,-0.635) 4(-2.711,-1.905) 5(2.711,-1.905) 6(2.711,-0.635) 7(2.711,0.635) 8(2.711,1.905)
  silkscreen extent -2.88,-2.57 2.06,2.91, body extent -3.01,-2.45 3.01,2.45, height 1.63
TLV75533PDBVR [mm] "SOT23, 5-Leads, Body 2,85x2,80mm, Pitch 0,95mm, IPC Medium Density"
  rrect15% 1.1x0.6 smd mask+0.051: 1(-1.35,0.95) 2(-1.35,0) 3(-1.35,-0.95) 4(1.25,-0.95) 5(1.25,0.95)
  rrect15% 0.975x1.7 smd mask+0.051: 2(0,0)
  silkscreen extent -2.42,-1.6 1.3,1.6, body extent -1.4,-1.45 1.4,1.45, height 1.45
TPD1E0B04DPYR [mm]
  rect 0.4x0.7 smd mask+0.051: 1(-0.35,0) 2(0.35,0)
  silkscreen extent -0.9,-0.47 0.67,0.47, body extent -0.53,-0.34 0.53,0.34, height 0.54
USB4085-GF-A [mm]
  round 0.65 hole 0.4 mask+0.048: A1(0,0) A4(0.85,0) A5(1.7,0) A6(2.55,0) A7(3.4,0) A8(4.25,0) A9(5.1,0) A12(5.95,0) B1(5.95,-1.35) B4(5.1,-1.35) B5(4.25,-1.35) B6(3.4,-1.35) B7(2.55,-1.35) B8(1.7,-1.35) B9(0.85,-1.35) B12(0,-1.35)
  oval 0.9x1.7 hole 0.6 slot 1.4 at 90 deg: S1(-1.35,-4.36) S2(7.3,-4.36)
  oval 0.9x2.4 hole 0.6 slot 2.1 at 90 deg: S3(-1.35,-0.98) S4(7.3,-0.98)
  silkscreen extent -2.1,-6.1 8.06,1.4, body extent -1.5,-8.61 7.45,0.56, height 3.46
W25Q32RVXHJQ_TR [mm]
  rect 0.9x0.32 smd mask+0.038: 1(-1.475,0.75) 2(-1.475,0.25) 3(-1.475,-0.25) 4(-1.475,-0.75) 5(1.475,-0.75) 6(1.475,-0.25) 7(1.475,0.25) 8(1.475,0.75)
  rect 0.3x1.7 smd mask+0.038: 9(0,0)
  silkscreen extent -1.97,-1.12 1.51,1.53, body extent -1.55,-1 1.55,1, height 0.4
XPYC042LFBN-RC [mm]
  rect 1.52x1.52 hole 1.02: 1(0,0)
  round 1.52 hole 1.02: 2(0,2.54) 3(2.54,0) 4(2.54,2.54) 5(5.08,0) 6(5.08,2.54) 7(7.62,0) 8(7.62,2.54)
  silkscreen extent -2.1,-1.27 9.14,3.81, body extent -1.52,-1.27 9.14,3.81, height 8.63

## Part data
C1 C2: library part EMK105BJ105KV-F, "MLCC - 1µF 16V 0402 X5R ±10%.", Capacitor Type=Ceramic, Case/Package=0402, Manufacturer 1="Taiyo Yuden", Max Operating Temperature=85°C, Min Operating Temperature=-55°C, Package Shape=Rectangular, Package Style=SMTMeter, Rated DC Voltage (URdc)=16V, Supplier Part Number 1=84R9109, Temperature Characteristics Code=X5R, Tolerance  (fill in as +-)=10%, .Mounting=SMT, Category="Ceramic Capacitors", ComponentLink1Description=https://datasheet.ciiva.com:443/pdfs/VipMasterIC/IC/TAIY/TAIY-S-A0009096450/TAIY-S-A0009096597-1.pdf?src-supplier=IHS+Markit, ComponentLink1URL=https://datasheet.ciiva.com:443/pdfs/VipMasterIC/IC/TAIY/TAIY-S-A0009096450/TAIY-S-A0009096597-1.pdf?src-supplier=IHS+Markit, ComponentLink2Description=https://datasheet.ciiva.com/134/emk105bj105kv-f-ss-134209.pdf?src-supplier=Digikey, ComponentLink2URL=https://datasheet.ciiva.com/134/emk105bj105kv-f-ss-134209.pdf?src-supplier=Digikey, ComponentLink3Description=https://datasheet.ciiva.com/30259/265emk105bj105kv-f-30259872.pdf?src-supplier=Onlinecomponents.com, ComponentLink3URL=https://datasheet.ciiva.com/30259/265emk105bj105kv-f-30259872.pdf?src-supplier=Onlinecomponents.com, ComponentLink4Description=https://datasheet.ciiva.com/15920/964emk105bj105kv-f-15920402.pdf?src-supplier=Onlinecomponents.com, ComponentLink4URL=https://datasheet.ciiva.com/15920/964emk105bj105kv-f-15920402.pdf?src-supplier=Onlinecomponents.com, ComponentLink5Description=https://datasheet.ciiva.com/26871/getdatasheetpartid-638287-26871289.pdf?src-supplier=Verical, ComponentLink5URL=https://datasheet.ciiva.com/26871/getdatasheetpartid-638287-26871289.pdf?src-supplier=Verical, ComponentLink6Description=https://datasheet.ciiva.com/5424/mlcc01-e-5424190.pdf?src-supplier=Mouser, ComponentLink6URL=https://datasheet.ciiva.com/5424/mlcc01-e-5424190.pdf?src-supplier=Mouser, ComponentLink7Description=https://datasheet.ciiva.com/22694/1497285-22694239.pdf?src-supplier=Element14, ComponentLink7URL=https://datasheet.ciiva.com/22694/1497285-22694239.pdf?src-supplier=Element14, ComponentLink8Description=https://datasheet.ciiva.com/7657/1497285-7657320.pdf?src-supplier=Element14, ComponentLink8URL=https://datasheet.ciiva.com/7657/1497285-7657320.pdf?src-supplier=Element14, Dielectric Material=Ceramic, Height=0.5mm, JESD-609 Code=e3, Length=1mm, Manufacturer Part Number 1=EMK105BJ105KV-F, Mounting Technology="Surface Mount", Multilayer=Yes, Packaging="Tape and Reel", Pins=2, Pricing="10000=0,007, 20000=0,008 (USD)", Reach SVHC Compliant=Yes, RoHS=Yes, RoHS Compliant=Yes, Stock=100000, Supplier 1=Avnet, Terminal Finish=Nickel, Termination=Wraparound, Tolerance (fill in as +-)=10%, Width=0.5mm
C3 C4 C5 C6 C7 C8 C9 C10 C11 C15 C21 C22 C23 C28 C29 C30 C31 C32 C33 C34 C35 C36: library part CL05B104KP5NNNC, "MLCC - 100nF 10V X7R 0402 ±10% Ceramic Capacitor", Capacitor Type=Ceramic, Case/Package=0402, Manufacturer 1=Samsung, Max Operating Temperature=125°C, Min Operating Temperature=-55°C, Package Shape=Rectangular, Package Style=SMTMeter, Rated DC Voltage (URdc)=10V, Supplier Part Number=1276-1002-1-ND, Temperature Characteristics Code=X7R, Tolerance  (fill in as +-)=10%, .Mounting=SMT, Category="Ceramic Capacitors", ComponentLink1Description=https://datasheet.ciiva.com:443/pdfs/VipMasterIC/IC/SEMS/SEMS-S-A0008523115/SEMS-S-A0008523129-1.pdf?src-supplier=IHS+Markit, ComponentLink1URL=https://datasheet.ciiva.com:443/pdfs/VipMasterIC/IC/SEMS/SEMS-S-A0008523115/SEMS-S-A0008523129-1.pdf?src-supplier=IHS+Markit, ComponentLink2Description=https://datasheet.ciiva.com/15165/getdatasheetpartid-37100-15165107.pdf?src-supplier=Verical, ComponentLink2URL=https://datasheet.ciiva.com/15165/getdatasheetpartid-37100-15165107.pdf?src-supplier=Verical, ComponentLink3Description=https://datasheet.ciiva.com/16498/cl05b104kq5nnnc-16498491.pdf?src-supplier=Future+Electronics, ComponentLink3URL=https://datasheet.ciiva.com/16498/cl05b104kq5nnnc-16498491.pdf?src-supplier=Future+Electronics, Dielectric Material=Ceramic, Height=0.5mm, JESD-609 Code=e3, Length=1mm, Manufacturer Part Number 1=CL05B104KP5NNNC, Mounting Technology="Surface Mount", Multilayer=Yes, Packaging="Tape and Reel", Pins=2, Pricing="1=0,08, 10=0,004, 100=0,0036, 1000=0,0032 (USD)", Reach SVHC Compliant=Yes, RoHS=Yes, RoHS Compliant=Yes, Stock=29591550, Supplier=Digikey, Terminal Finish=Nickel, Termination=Wraparound, Tolerance (fill in as +-)=10%, Width=0.5mm
C12 C13 C14 C16 C17 C20 C24: library part CL05A475KQ5NRNC, "MLCC - 4.7 µF 6.3V 0402 X5R ±10%  Ceramic Capacitor X5R", Capacitor Type=Ceramic, Case/Package=0402, Manufacturer 1=Samsung, Max Operating Temperature=85°C, Min Operating Temperature=-55°C, Package Shape=Rectangular, Rated DC Voltage (URdc)=6.3V, Supplier Part Number=1276-1481-1-ND, Temperature Characteristics Code=X5R, Tolerance  (fill in as +-)=10%, .Mounting=SMT, Category="Ceramic Capacitors", ComponentLink1Description=https://datasheet.ciiva.com:443/pdfs/VipMasterIC/IC/SEMS/SEMS-S-A0008521219/SEMS-S-A0008521124-1.pdf?src-supplier=IHS+Markit, ComponentLink1URL=https://datasheet.ciiva.com:443/pdfs/VipMasterIC/IC/SEMS/SEMS-S-A0008521219/SEMS-S-A0008521124-1.pdf?src-supplier=IHS+Markit, ComponentLink2Description=https://datasheet.ciiva.com/25793/cl05a475kq5nrnc-25793634.pdf?src-supplier=Digikey, ComponentLink2URL=https://datasheet.ciiva.com/25793/cl05a475kq5nrnc-25793634.pdf?src-supplier=Digikey, ComponentLink3Description=https://datasheet.ciiva.com/26838/getdatasheetpartid-353228-26838196.pdf?src-supplier=Verical, ComponentLink3URL=https://datasheet.ciiva.com/26838/getdatasheetpartid-353228-26838196.pdf?src-supplier=Verical, Dielectric Material=Ceramic, JESD-609 Code=e3, Manufacturer Part Number 1=CL05A475KQ5NRNC, Mounting Technology="Surface Mount", Multilayer=Yes, Packaging="Tape and Reel", Pins=2, Pricing="1=0,08, 10=0,026, 100=0,016, 1000=0,0112, 2500=0,0096 (USD)", Reach SVHC Compliant=Yes, RoHS=Yes, RoHS Compliant=Yes, Stock=761086, Supplier=Digikey, Terminal Finish=Nickel, Termination=Wraparound, Tolerance (fill in as +-)=10%
C18 C19: library part GJM1555C1H150FB01D, "MLCC - 15 pF 50V 0402 X5R ±1%  Ceramic Capacitor C0G, NP0", Capacitor Type=Ceramic, Case/Package=0402, Manufacturer 1=Murata, Max Operating Temperature=125°C, Min Operating Temperature=-55°C, Package Shape=Rectangular, Rated DC Voltage (URdc)=50V, Supplier Part Number=490-11191-1-ND, Temperature Characteristics Code=C0G, Tolerance  (fill in as +-)=1%, .Mounting=SMT, Category="Ceramic Capacitors", ComponentLink1Description=https://datasheet.ciiva.com:443/pdfs/VipMasterIC/IC/MURE/MURE-S-A0004383799/MURE-S-A0004384018-1.pdf?src-supplier=IHS+Markit, ComponentLink1URL=https://datasheet.ciiva.com:443/pdfs/VipMasterIC/IC/MURE/MURE-S-A0004383799/MURE-S-A0004384018-1.pdf?src-supplier=IHS+Markit, ComponentLink2Description=https://datasheet.ciiva.com/11608/c02e-11608383.pdf?src-supplier=Avnet, ComponentLink2URL=https://datasheet.ciiva.com/11608/c02e-11608383.pdf?src-supplier=Avnet, Dielectric Material=Ceramic, JESD-609 Code=e3, Manufacturer Part Number 1=GJM1555C1H150FB01D, Mounting Technology="Surface Mount", Multilayer=Yes, Packaging="Tape and Reel", Pins=2, Pricing="1=0,13, 10=0,074, 100=0,0446, 1000=0,02973, 2500=0,02606, 5000=0,02385 (USD)", Reach SVHC Compliant=Yes, RoHS=Yes, RoHS Compliant=Yes, Stock=61415, Supplier=Digikey, Terminal Finish=Nickel, Termination=Wraparound, Tolerance (fill in as +-)=1%
C25 C26 C27: library part GRM155R61H474KE11D, "MLCC - 480nF 50V X5R 0402  ±10%  Ceramic Capacitor", Capacitor Type=Ceramic, Case/Package=0402, Manufacturer 1=Murata, Max Operating Temperature=85°C, Min Operating Temperature=-55°C, Package Shape=Rectangular, Rated DC Voltage (URdc)=50V, Supplier Part Number=490-16354-1-ND, Temperature Characteristics Code=X5R, Tolerance  (fill in as +-)=10%, .Mounting=SMT, Category="Ceramic Capacitors", ComponentLink1Description=https://datasheet.ciiva.com:443/pdfs/VipMasterIC/IC/MURE/MURE-S-A0004362469/MURE-S-A0004364779-1.pdf?src-supplier=IHS+Markit, ComponentLink1URL=https://datasheet.ciiva.com:443/pdfs/VipMasterIC/IC/MURE/MURE-S-A0004362469/MURE-S-A0004364779-1.pdf?src-supplier=IHS+Markit, ComponentLink2Description=http://search.murata.co.jp/Ceramy/image/img/A01X/G101/ENG/GRM155R61H474KE11-01.pdf?src-supplier=Digikey, ComponentLink2URL=http://search.murata.co.jp/Ceramy/image/img/A01X/G101/ENG/GRM155R61H474KE11-01.pdf?src-supplier=Digikey, ComponentLink3Description=https://datasheet.octopart.com/GRM155R61H474KE11D-Murata-datasheet-99353828.pdf?src-supplier=Future+Electronics, ComponentLink3URL=https://datasheet.octopart.com/GRM155R61H474KE11D-Murata-datasheet-99353828.pdf?src-supplier=Future+Electronics, Dielectric Material=Ceramic, JESD-609 Code=e3, Manufacturer Part Number 1=GRM155R61H474KE11D, Mounting Technology="Surface Mount", Multilayer=Yes, Packaging="Tape and Reel", Pins=2, Pricing="1=0,1, 10=0,051, 100=0,0304, 1000=0,01969, 2500=0,01739, 5000=0,01546 (USD)", Reach SVHC Compliant=Yes, RoHS=Yes, RoHS Compliant=Yes, Stock=147570, Supplier=Digikey, Terminal Finish=Tin, Termination=Wraparound, Tolerance (fill in as +-)=10%
CN1: "CONN - CONN RCPT USB2.0 TYPE C 16+8POS", Manufacturer 1=GCT, Package=None, Supplier Part Number 1=2073-USB4085-GF-ACT-ND, .Mounting=PTH, Check_prices=https://www.snapeda.com/parts/USB4085-GF-A/Global+Connector+Technology/view-part/?ref=eda, Manufacturer Part Number 1=USB4085-GF-A, MF="Global Connector Technology", SnapEDA_Link=https://www.snapeda.com/parts/USB4085-GF-A/Global+Connector+Technology/view-part/?ref=snap, Supplier 1=DigiKey
CN2: "CONN - Connector Header Through Hole 20 position 0.100\" (2.54mm)", Manufacturer 1="On Shore Technology Inc.", .Mounting=PTH, Arrow Part Number=302-S201, Arrow Price/Stock=https://www.arrow.com/en/products/302-s201/on-shore-technology?region=nac, Datasheet Link=https://www.on-shore.com/wp-content/uploads/2018/04/302-SXX1.pdf, Height=9.05mm, Manufacturer Part Number 1=302-S201
CN3: "CONN - 3 Position connector Header Through Hole  0.100\" (2.54mm)", Manufacturer 1=Sullins, .Mounting=PTH, Datasheet Link=https://s3.amazonaws.com/catalogspreads-pdf/PAGE112-113%20.100%20MALE%20HDR.pdf, Height=8.38mm, Manufacturer Part Number 1=PEC03SAAN
CN4: "CONN - 8 Position Header Connector 0.100\" (2.54mm) Through Hole Gold", Manufacturer 1=Sullins, .Mounting=PTH, Datasheet Link=https://drawings-pdf.s3.amazonaws.com/10492.pdf, Height=8.7mm, Manufacturer Part Number 1=PPPC042LFBN-RC
CN5 CN6: "CONN - Connector Header Through Hole, Right Angle 2 position 0.098\" (2.50mm)", Manufacturer 1="JST (JAPAN SOLDERLESS TERMINALS)", Manufacturer Part Number 1=S2B-XH-A-1(LF)(SN), Mouser Part Number=306-S2BXHA1LFSN, .Mounting=PTH, Datasheet Link=http://www.jst-mfg.com/product/pdf/eng/eXH.pdf, Height=6.1mm, Mouser Price/Stock=https://www.mouser.co.uk/ProductDetail/JST-Commercial/S2B-XH-A-1LFSN?qs=QpmGXVUTftHhNeC%252BPQWeTw%3D%3D
CN7 CN8: "CONN - Connector Header Through Hole, Right Angle 3 position 0.098\" (2.50mm)", Manufacturer 1="JST (JAPAN SOLDERLESS TERMINALS)", Manufacturer Part Number 1=S3B-XH-A, .Mounting=PTH, Datasheet Link=http://www.farnell.com/datasheets/2057209.pdf, Height=6.1mm
D1: "DIODE - TVS - 17V Clamp 110A (8/20µs) Ipp Tvs Diode Surface Mount DFN1610-2L", Manufacturer 1="Eaton Bussmann", Supplier Part Number=283-STN161050U852CT-ND, .Mounting=SMT, Category="TVS Diodes", ComponentLink1Description=https://datasheet.octopart.com/STN161050U852-Cooper-Bussmann-datasheet-154846660.pdf?src-supplier=Sager+Electronics, ComponentLink1URL=https://datasheet.octopart.com/STN161050U852-Cooper-Bussmann-datasheet-154846660.pdf?src-supplier=Sager+Electronics, Manufacturer Part Number 1=STN161050U852, Pricing="1=0,36, 10=0,25, 100=0,133, 500=0,119, 1000=0,101 (USD)", RoHS=No, Stock=8977, Supplier=Digikey
D2 D3: "DIODE - TVS - 19V Clamp 1.7A (8/20µs) Ipp Tvs Diode Surface Mount 2-X1SON (1x.60)", Manufacturer 1="Texas Instruments", Supplier Part Number=296-47864-1-ND, .Mounting=SMT, Category="Integrated Circuits (ICs)", ComponentLink1Description=https://www.ti.com:443/lit/ds/symlink/tpd1e0b04.pdf?src-supplier=IHS+Markit, ComponentLink1URL=https://www.ti.com:443/lit/ds/symlink/tpd1e0b04.pdf?src-supplier=IHS+Markit, ComponentLink2Description=http://www.ti.com/lit/ds/symlink/tpd1e0b04.pdf?src-supplier=Digikey, ComponentLink2URL=http://www.ti.com/lit/ds/symlink/tpd1e0b04.pdf?src-supplier=Digikey, ComponentLink3Description=http://www.ti.com/general/docs/suppproductinfo.tsp?distId=10&amp;gotoUrl=http%3A%2F%2Fwww.ti.com%2Flit%2Fgpn%2Ftpd1e0b04&src-supplier=Digikey, ComponentLink3URL=http://www.ti.com/general/docs/suppproductinfo.tsp?distId=10&amp;gotoUrl=http%3A%2F%2Fwww.ti.com%2Flit%2Fgpn%2Ftpd1e0b04&src-supplier=Digikey, Diode Type="TRANS VOLTAGE SUPPRESSOR", JESD-609 Code=e4, Manufacturer Part Number 1=TPD1E0B04DPYR, Moisture Sensitivity Level=1, Pricing="1=0,32, 10=0,216, 100=0,095, 500=0,09, 1000=0,085, 2000=0,0835, 5000=0,082 (USD)", Reach SVHC Compliant=Yes, RoHS=Yes, RoHS Compliant=Yes, Stock=1526, Supplier=Digikey, Terminal Finish=Nickel
D4: "DIODE - LED Red 631nm LED Indication - Discrete 2V 0603 (1608 Metric)", Color=Red, Forward Current=30mA, Forward Voltage=2.4V, Manufacturer 1="Vishay Lite-On", Max Operating Temperature=85°C, Min Operating Temperature=-30°C, Reverse Voltage-Max=5V, Supplier Part Number=160-1436-1-ND, .Mounting=SMT, Category=LEDs, Channels=1, Color@wavelength=Red, ComponentLink1Description=https://datasheet.ciiva.com:443/pdfs/VipMasterIC/IC/LITE/LITE-S-A0003370447/LITE-S-A0003370447-1.pdf?src-supplier=IHS+Markit, ComponentLink1URL=https://datasheet.ciiva.com:443/pdfs/VipMasterIC/IC/LITE/LITE-S-A0003370447/LITE-S-A0003370447-1.pdf?src-supplier=IHS+Markit, ComponentLink2Description=https://datasheet.ciiva.com/11774/0900766b80dc02a9-11774043.pdf?src-supplier=Rs, ComponentLink2URL=https://datasheet.ciiva.com/11774/0900766b80dc02a9-11774043.pdf?src-supplier=Rs, ComponentLink3Description=https://datasheet.ciiva.com/12403/100-ltst-c190krkt-59805-12403895.pdf?src-supplier=Mouser, ComponentLink3URL=https://datasheet.ciiva.com/12403/100-ltst-c190krkt-59805-12403895.pdf?src-supplier=Mouser, ComponentLink4Description=https://datasheet.ciiva.com/16427/ltst-c190krkt-16427674.pdf?src-supplier=Future+Electronics, ComponentLink4URL=https://datasheet.ciiva.com/16427/ltst-c190krkt-16427674.pdf?src-supplier=Future+Electronics, ComponentLink5Description=https://datasheet.ciiva.com/19482/1260381-19482354.pdf?src-supplier=Jameco, ComponentLink5URL=https://datasheet.ciiva.com/19482/1260381-19482354.pdf?src-supplier=Jameco, ComponentLink6Description=https://datasheet.ciiva.com/15117/getdatasheetpartid-57395-15117240.pdf?src-supplier=Verical, ComponentLink6URL=https://datasheet.ciiva.com/15117/getdatasheetpartid-57395-15117240.pdf?src-supplier=Verical, ComponentLink7Description=https://datasheet.ciiva.com/2109/s-110-ltst-c190krkt-2109991.pdf?src-supplier=Digikey, ComponentLink7URL=https://datasheet.ciiva.com/2109/s-110-ltst-c190krkt-2109991.pdf?src-supplier=Digikey, ComponentLink8Description=https://datasheet.ciiva.com/2109/s-110-ltst-c190krkt-2109992.pdf?src-supplier=Digikey, ComponentLink8URL=https://datasheet.ciiva.com/2109/s-110-ltst-c190krkt-2109992.pdf?src-supplier=Digikey, ComponentLink9Description=https://datasheet.ciiva.com/2109/s-110-ltst-c190krkt-2109993.pdf?src-supplier=Digikey, ComponentLink9URL=https://datasheet.ciiva.com/2109/s-110-ltst-c190krkt-2109993.pdf?src-supplier=Digikey, ComponentLink10Description=https://datasheet.ciiva.com/26937/getdatasheetpartid-631582-26937958.pdf?src-supplier=Verical, ComponentLink10URL=https://datasheet.ciiva.com/26937/getdatasheetpartid-631582-26937958.pdf?src-supplier=Verical, Lens Style="WATER CLEAR", Luminous Intensity-Min=130cd, Luminous Intensity-Nom=54mcd, Manufacturer Part Number 1=LTST-C190KRKT, Mounting Technology="Surface Mount", Optoelectronic Device Type="SINGLE COLOR LED", Overall Height=0.8mm, Packaging="Tape and Reel", Pins=2, Pricing="1=0,14, 10=0,094, 100=0,0649, 500=0,05134, 1000=0,04682, 2000=0,04295 (USD)", Reach SVHC Compliant=Yes, RoHS=Yes, RoHS Compliant=Yes, Shape=Rectangular, Size=1.1mm, Stock=23487, Supplier=Digikey, Terminal Pitch=1.5mm, Viewing Angle=130°
D5: "DIODE - TVS CLAMP - 37V (Typ) Clamp 5.7A (8/20µs) Ipp Tvs Diode Surface Mount SC-70-3", Manufacturer 1="Texas Instruments", Mouser Part Number=595-ESD2CAN24DCKRQ1, .Mounting=SMT, Arrow Part Number=ESD2CAN24DCKRQ1, Arrow Price/Stock=https://www.arrow.com/en/products/esd2can24dckrq1/texas-instruments?utm_currency=USD&region=nac, Datasheet Link=https://www.ti.com/lit/ds/symlink/esd2can24-q1.pdf?ts=1669637432096&ref_url=https%253A%252F%252Fwww.ti.com%252Fproduct%252FESD2CAN24-Q1, Height=1.1mm, Manufacturer Part Number 1=ESD2CAN24DCKRQ1, Mouser Price/Stock=https://www.mouser.co.uk/ProductDetail/Texas-Instruments/ESD2CAN24DCKRQ1?qs=Y0Uzf4wQF3mF7ctB4rszMA%3D%3D
D6: "DIODE - TVS CLAMP 26V, 14V Clamp 17A (8/20µs) Ipp Tvs Diode Surface Mount SOT-23-3", Manufacturer 1=Bourns, Mouser Part Number=652-CDSOT23-SM712, .Mounting=SMT, Arrow Part Number=CDSOT23-SM712, Arrow Price/Stock=https://www.arrow.com/en/products/cdsot23-sm712/bourns?utm_currency=USD&region=nac, Datasheet Link=http://uk.rs-online.com/web/p/products/7673728, Height=1.17mm, Manufacturer Part Number 1=CDSOT23-SM712, Mouser Price/Stock=https://www.mouser.co.uk/ProductDetail/Bourns/CDSOT23-SM712?qs=FuI%252BOVLl4%2FLTY%2FGQ265RLA%3D%3D
D7: "DIODE - LED  Orange 605nm LED Indication - Discrete 2V 0603 (1608 Metric)", Color=Orange, Forward Current=30mA, Forward Voltage=2.4V, Manufacturer 1="Vishay Lite-On", Max Operating Temperature=85°C, Min Operating Temperature=-55°C, Reverse Voltage-Max=5V, .Mounting=SMT, Category=LEDs, Channels=1, Color@wavelength=Orange, ComponentLink1Description=https://datasheet.ciiva.com:443/pdfs/VipMasterIC/IC/LITE/LITE-S-A0008267416/LITE-S-A0008267416-1.pdf?src-supplier=IHS+Markit, ComponentLink1URL=https://datasheet.ciiva.com:443/pdfs/VipMasterIC/IC/LITE/LITE-S-A0008267416/LITE-S-A0008267416-1.pdf?src-supplier=IHS+Markit, ComponentLink2Description=https://datasheet.ciiva.com/11774/0900766b80dc02a7-11774744.pdf?src-supplier=Rs, ComponentLink2URL=https://datasheet.ciiva.com/11774/0900766b80dc02a7-11774744.pdf?src-supplier=Rs, ComponentLink3Description=https://datasheet.ciiva.com/12400/100-ltst-c190kfkt-53640-12400769.pdf?src-supplier=Mouser, ComponentLink3URL=https://datasheet.ciiva.com/12400/100-ltst-c190kfkt-53640-12400769.pdf?src-supplier=Mouser, ComponentLink4Description=https://datasheet.ciiva.com/15201/getdatasheetpartid-309341-15201388.pdf?src-supplier=Verical, ComponentLink4URL=https://datasheet.ciiva.com/15201/getdatasheetpartid-309341-15201388.pdf?src-supplier=Verical, ComponentLink5Description=https://datasheet.ciiva.com/16396/lite-on20ltst-c190kfkt-16396246.pdf?src-supplier=Future+Electronics, ComponentLink5URL=https://datasheet.ciiva.com/16396/lite-on20ltst-c190kfkt-16396246.pdf?src-supplier=Future+Electronics, ComponentLink6Description=https://datasheet.ciiva.com/2109/s-110-ltst-c190kfkt-2109976.pdf?src-supplier=Digikey, ComponentLink6URL=https://datasheet.ciiva.com/2109/s-110-ltst-c190kfkt-2109976.pdf?src-supplier=Digikey, ComponentLink7Description=https://datasheet.ciiva.com/2109/s-110-ltst-c190kfkt-2109977.pdf?src-supplier=Digikey, ComponentLink7URL=https://datasheet.ciiva.com/2109/s-110-ltst-c190kfkt-2109977.pdf?src-supplier=Digikey, ComponentLink8Description=https://datasheet.ciiva.com/2109/s-110-ltst-c190kfkt-2109978.pdf?src-supplier=Digikey, ComponentLink8URL=https://datasheet.ciiva.com/2109/s-110-ltst-c190kfkt-2109978.pdf?src-supplier=Digikey, JESD-609 Code=e3, Lens Style="WATER CLEAR", Luminous Intensity-Min=130cd, Luminous Intensity-Nom=90mcd, Manufacturer Part Number 1=LTST-C190KFKT, Mounting Technology="Surface Mount", Optoelectronic Device Type="SINGLE COLOR LED", Overall Height=0.8mm, Packaging="Tape and Reel", Pins=2, Pricing="4000=0,0337, 8000=0,0285, 24000=0,0224, 48000=0,022, 100000=0,0218 (USD)", Reach SVHC Compliant=Yes, RoHS=Yes, RoHS Compliant=Yes, Shape=Rectangular, Size=1.1mm, Stock=8000, Supplier="Arrow Electronics", Supplier Part Number=LTST-C190KFKT, Terminal Finish=Tin, Terminal Pitch=1.5mm, Viewing Angle=130°
FID1 FID2: "Fiducials"
L1: library part AOTA-B201610S3R3-101-T, "IND - 3.3 µH 2.1A 0806 140mOhm Shielded Molded Inductor  Max 0806 (2016 Metric)", Manufacturer 1=Abracon, Supplier Part Number=535-AOTA-B201610S3R3-101-TCT-ND, .Mounting=SMT, Manufacturer Part Number 1=AOTA-B201610S3R3-101-T, Pricing="1=0,22, 10=0,181, 100=0,1497, 1000=0,12251 (USD)", RoHS=No, Stock=2887, Supplier=Digikey
MH1 MH2 MH3 MH4: "Mounting Hole 7.4mm Diameter 3.2mm Drill"
R1 R2: library part ERA-2ARC512X, "RES - 5K1 Ohm 1/16W 0402 ±0.25% 50V", Manufacturer 1=Panasonic, Supplier Part Number=667-ERA-2ARC512X, .Mounting=SMT, Category="Chip SMD Resistors", ComponentLink1Description=https://industrial.panasonic.com/cdbs/www-data/pdf/RDM0000/AOA0000C307.pdf?src-supplier=Digikey, ComponentLink1URL=https://industrial.panasonic.com/cdbs/www-data/pdf/RDM0000/AOA0000C307.pdf?src-supplier=Digikey, Manufacturer Part Number 1=ERA-2ARC512X, Pricing="1=0,21, 10=0,177, 50=0,157, 100=0,147, 1000=0,121, 10000=0,104 (USD)", RoHS=Yes, Stock=3234, Supplier=Mouser
R3 R22 R23 R25 R26 R27 R28 R29 R34: library part RC1005F103CS, "RES - 10K 1/16W 0402 ±1% Chip Resistor", Case/Package=0402, Manufacturer 1=Samsung, Max Operating Temperature=125°C, Min Operating Temperature=-55°C, Package Height=0.35mm, Package Length=1mm, Package Shape=Rectangular, Package Width=0.5mm, Power=60mW, Resistor Type="FIXED RESISTOR", Supplier Part Number=1276-3431-1-ND, Temperature Coefficient (ppm/Cel)=100, Tolerance=1%, Working Voltage=50V, .Mounting=SMT, Category="Chip SMD Resistors", ComponentLink1Description=https://datasheet.ciiva.com:443/pdfs/VipMasterIC/IC/SEMS/SEMS-S-A0001326806/SEMS-S-A0001326806-1.pdf?src-supplier=IHS+Markit, ComponentLink1URL=https://datasheet.ciiva.com:443/pdfs/VipMasterIC/IC/SEMS/SEMS-S-A0001326806/SEMS-S-A0001326806-1.pdf?src-supplier=IHS+Markit, ComponentLink2Description=https://datasheet.ciiva.com/15196/getdatasheetpartid-504789-15196214.pdf?src-supplier=Verical, ComponentLink2URL=https://datasheet.ciiva.com/15196/getdatasheetpartid-504789-15196214.pdf?src-supplier=Verical, ComponentLink3Description=https://datasheet.ciiva.com/16481/rcseries-16481007.pdf?src-supplier=Future+Electronics, ComponentLink3URL=https://datasheet.ciiva.com/16481/rcseries-16481007.pdf?src-supplier=Future+Electronics, Construction=Chip, JESD-609 Code=e3, Manufacturer Part Number 1=RC1005F103CS, Mounting Technology="Surface Mount", Packaging="Tape and Reel", Pins=2, Pricing="1=0,1, 10=0,039, 100=0,0201, 1000=0,01175, 2500=0,0099, 5000=0,00882 (USD)", Reach SVHC Compliant=Yes, RoHS=Yes, RoHS Compliant=Yes, Stock=10935408, Supplier=Digikey, Technology="METAL GLAZE/THICK FILM", Terminal Finish=Nickel